# Altium PCB PCB1.PcbDoc
Units mm, origin at the board's own origin, x right, y up, seen from the top; angles counter-clockwise.
Board outline 97.16 x 44.58 mm, 2 copper layers (Top Layer, Bottom Layer); 28 components, 19 nets, 65 pads, 0 vias.
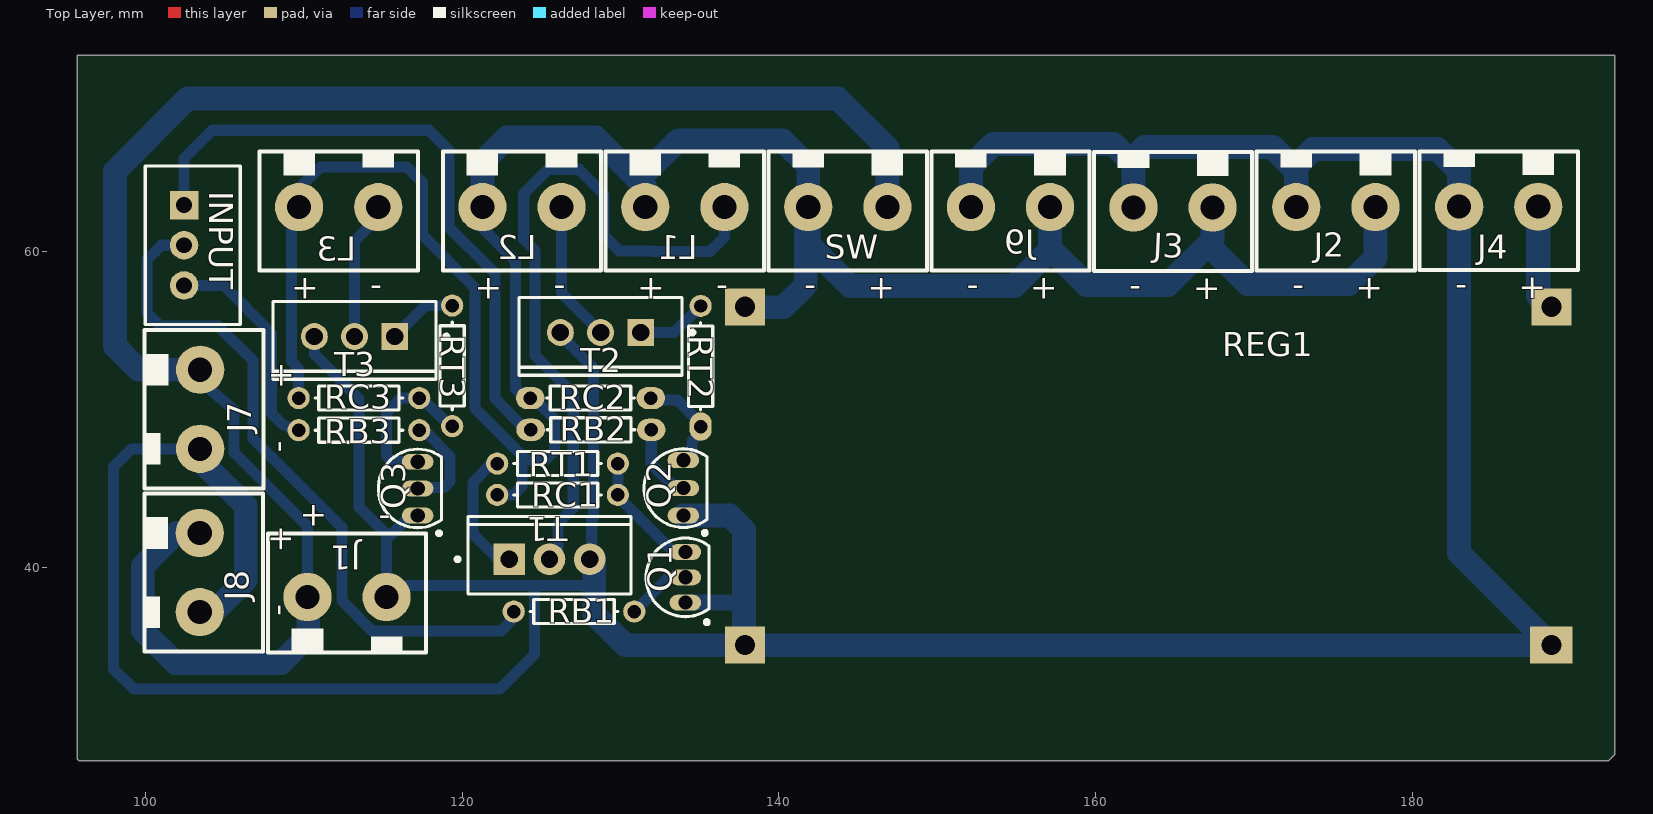
[diagram p0: Top Layer view]
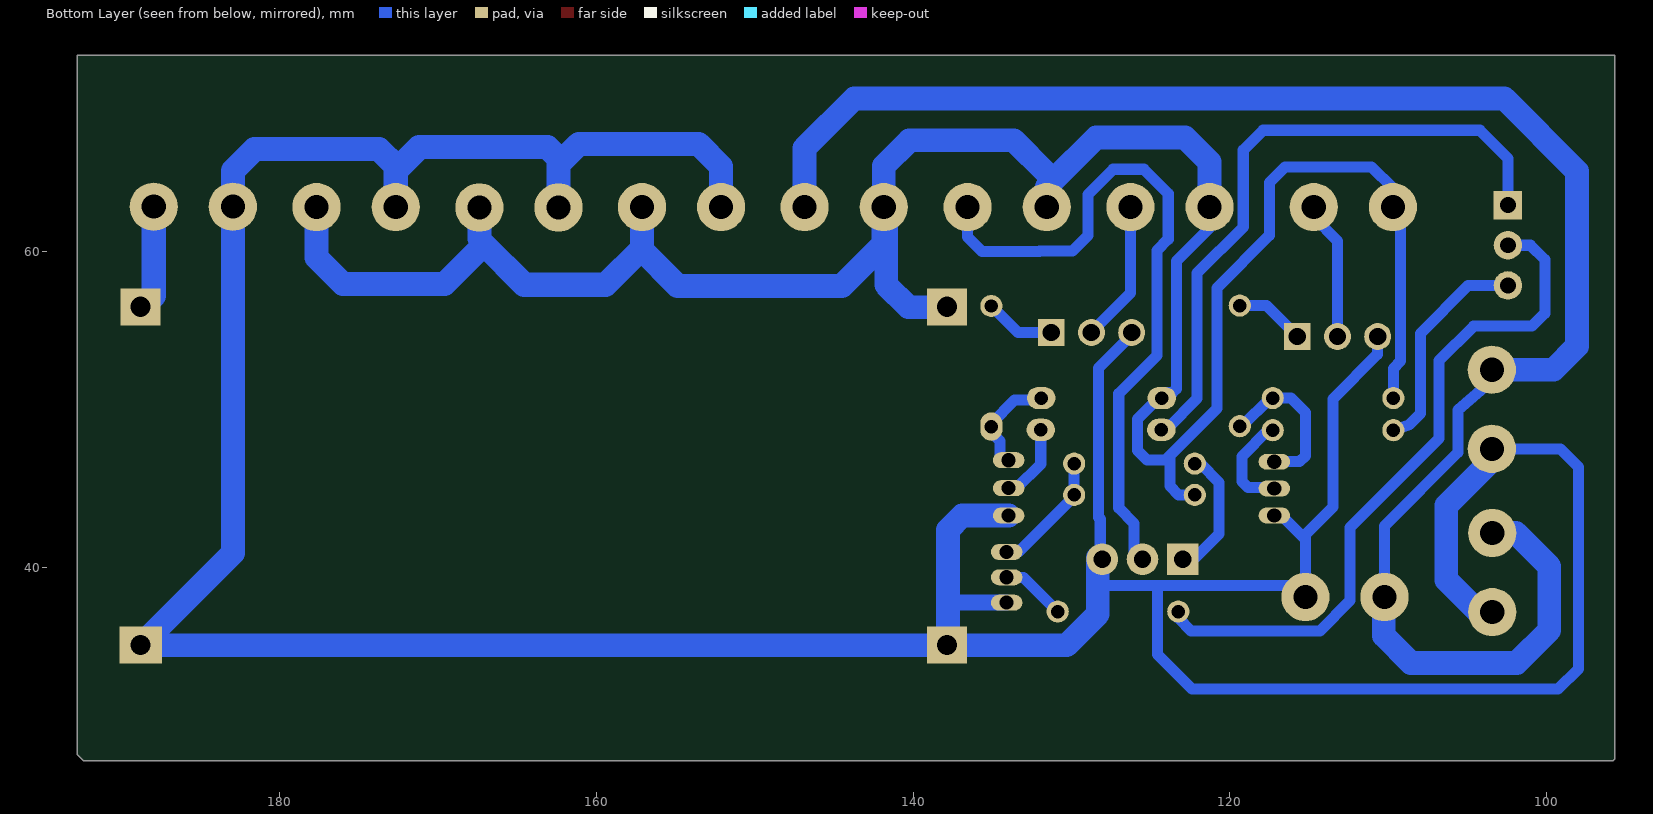
[diagram p1: Bottom Layer view, seen from below]

## Layer stack, top to bottom
Top Solder: solder mask 0.0102, Solder Resist, Dk 3.5
Top Layer: signal copper 0.0356
Dielectric 1: dielectric 0.32, FR-4, Dk 4.8
Bottom Layer: signal copper 0.0356
Bottom Solder: solder mask 0.0102, Solder Resist, Dk 3.5

## Board outline
95.656,27.94 95.783,27.813 192.405,27.813 192.811,28.219 192.811,72.365 192.786,72.39 95.656,72.39

## Design rules (kind name [scope] priority, off if disabled: settings)
Clearance [All] p1: gap=0.254 ignorepadtopadclearanceinfootprint=FALSE except(0: Arc-Hole Track-Hole SMDPad-Hole THPad-Hole Via-Hole Fill-Hole Poly-Hole Region-Hole Text-Hole)
PolygonConnect [All] p1: connectstyle=Relief reliefconductorwidth=0.254 reliefentries=4 polygonreliefangle="90 Angle" airgapwidth=0.254
RoutingVias [All] p1: holewidth=0.711 width=1.27 viastyle="Through Hole" minholewidth=0.711 minwidth=1.27 maxholewidth=0.711 maxwidth=1.27
SolderMaskExpansion [All] p1: expansion=0.102
Width [All] p1: maxlimit=2.3 minlimit=0.7 preferedwidth=0.7 minimp=50.000000 maximp=50.000000 favimp=50.000000
30 further rules are at their usual default settings.

## Components (designator, comment, footprint, x,y, rotation, side; value= is the part's Value field where it differs from the comment)
INPUT "Connector" "1x3x2.54 Pin Header TH V" 102.413,60.376 r270 top
J1 "Bateria" CONN2 112.711,38.151 r0 top
J2 "Driver 2" CONN2 175.184,62.789 r180 top
J3 "Driver 1" CONN2 164.897,62.763 r180 top
J4 "Salida 5V" CONN2 185.471,62.814 r180 top
J7 "Cargador de Bateria" CONN2 103.429,50.013 r270 top
J8 "Pantalla Bateria" CONN2 103.403,39.7 r270 top
J9 "Salida Regulador" CONN2 154.624,62.789 r180 top
L1 "Driver 2" CONN2 134.05,62.789 r0 top
L2 "Driver 2" CONN2 123.763,62.789 r0 top
L3 "Driver 2" CONN2 112.181,62.789 r0 top
Q1 "2N3904" TO-92A#1 134.087,39.395 r0 top
Q2 "2N3904" TO-92A#2 133.96,45.034 r0 top
Q3 "2N3904" TO-92A#3 117.17,45.013 r0 top
RB1 "Res1" AXIAL-0.3#1 127.051,37.236 r0 top value=10K
RB2 "Res1" AXIAL-0.3#2 128.118,48.717 r0 top value=10K
RB3 "Res1" AXIAL-0.3#1 113.462,48.692 r0 top value=10K
RC1 "Res1" AXIAL-0.3#1 126.009,44.602 r180 top value=1K
RC2 "Res1" AXIAL-0.3#2 128.092,50.724 r180 top value=1K
RC3 "Res1" AXIAL-0.3#1 113.462,50.724 r180 top value=1K
REG1 "Voltage regulator IN: 7-35V OUT: ADJ" CP8-ADJ 163.322,46.33 r0 top
RT1 "Res1" AXIAL-0.3#1 126.009,46.584 r180 top value=1K
RT2 "Res1" AXIAL-0.3#3 135.052,52.73 r90 top value=1K
RT3 "Res1" AXIAL-0.3#1 119.355,52.756 r90 top value=1K
SW "SWITCH" CONN2 144.348,62.789 r180 top
T1 "TIP31C" ONSC-TO-220-3-221A-09#1 125.501,40.538 r90 top
T2 "TIP31C" ONSC-TO-220-3-221A-09#2 128.727,54.864 r270 top
T3 "TIP31C" ONSC-TO-220-3-221A-09#2 113.182,54.61 r270 top

## Footprints (in the part's own frame and the unit in brackets; to place one, negate y for a bottom-side part, rotate by r counter-clockwise, add the part's x,y. Pads: shape width x height; smd on the part's side, far side on the other; paste and mask are expansions set on the pad)
"1x3x2.54 Pin Header TH V" [mm] "1x3x2.54 Pin Header TH V"
  rect 1.8x1.8 hole 1: 1(-2.54,0)
  round 1.8 hole 1: 2(0,0) 3(2.54,0)
  silkscreen extent -5,-2.45 5,3.55, body extent -3.81,-1.27 3.81,1.27, height 8.55
AXIAL-0.3#1 [mm] "Axial Device, Thru-Hole; 2 Leads; 0.3 in Pin Spacing"
  round 1.4 hole 0.85: 1(-3.81,0) 2(3.81,0)
  silkscreen extent -2.77,-0.76 2.77,0.76
AXIAL-0.3#2 [mm] "Axial Device, Thru-Hole; 2 Leads; 0.3 in Pin Spacing"
  oval 1.8x1.4 hole 0.85: 1(-3.81,0) 2(3.81,0)
  silkscreen extent -2.77,-0.76 2.77,0.76
AXIAL-0.3#3 [mm] "Axial Device, Thru-Hole; 2 Leads; 0.3 in Pin Spacing"
  oval 1.8x1.4 hole 0.85: 1(-3.81,0)
  round 1.4 hole 0.85: 2(3.81,0)
  silkscreen extent -2.77,-0.76 2.77,0.76
CONN2 [mil]
  round 120 hole 60: 1(-98.43,0) 2(98.42,0)
  silkscreen extent -197,-138 197,157, body extent -197,-138 197,157, height 394
CP8-ADJ [mil]
  rect 100x92 hole 50: IN+(-1003,400) IN-(-1003,-441) OUT+(1003,400)
  rect 106x92 hole 50: OUT-(1003,-441)
  body extent -1058,-497 1068,448, height 573
ONSC-TO-220-3-221A-09#1 [mm] "FM, 3-Leads, Body 10.3x4.85mm, Pitch 2.54mm"
  rect 2x2 hole 1.1: 1(0,2.54)
  round 2 hole 1.1: 2(0,0) 3(0,-2.54)
  silkscreen extent -2.2,-5.15 2.69,5.92, body extent -2.18,-5.15 2.67,5.15, height 19.85
ONSC-TO-220-3-221A-09#2 [mm] "FM, 3-Leads, Body 10.3x4.85mm, Pitch 2.54mm"
  rect 1.7x1.7 hole 1.1: 1(0,2.54)
  round 1.7 hole 1.1: 2(0,0) 3(0,-2.54)
  silkscreen extent -2.21,-5.15 2.69,5.93, body extent -2.18,-5.15 2.67,5.15, height 19.85
TO-92A#1 [mm] "TO, Flat Index; 3 In-Line, Axial Leads; Body Dia. 4.5mm; Leads 0.51 x 0.48 mm (max)"
  oval 2x1 hole 0.9: 1(0,-1.595) 2(0,0) 3(0,1.605)
  silkscreen extent -2.48,-2.95 1.5,2.48, body extent -2.48,-2.5 1.5,2.5, height 6.86
TO-92A#2 [mm] "TO, Flat Index; 3 In-Line, Axial Leads; Body Dia. 4.5mm; Leads 0.51 x 0.48 mm (max)"
  oval 2x1 hole 0.9: 1(0,-1.734) 2(0,0) 3(0,1.766)
  silkscreen extent -2.48,-2.95 1.5,2.48, body extent -2.48,-2.5 1.5,2.5, height 6.86
TO-92A#3 [mm] "TO, Flat Index; 3 In-Line, Axial Leads; Body Dia. 4.5mm; Leads 0.51 x 0.48 mm (max)"
  oval 2x1 hole 0.9: 1(0,-1.713) 2(0,0) 3(0,1.687)
  silkscreen extent -2.48,-2.95 1.5,2.48, body extent -2.48,-2.5 1.5,2.5, height 6.86

## Part data
INPUT: library part "Header 1x3"
J1 J2 J3 J4 J7 J8 J9 L1 L2 L3 SW: library part Bornera
Q1 Q2 Q3: "NPN General Purpose Amplifier", ComponentLink1Description="Manufacturer Link", ComponentLink1URL=http://www.fairchildsemi.com/, ComponentLink2Description=Datasheet, ComponentLink2URL=http://www.fairchildsemi.com/ds/2N%2F2N3904.pdf, DatasheetVersion=1997, LatestRevisionDate=15-Jan-2003, LatestRevisionNote="PCB Footprint 'BCY-W3/D4.7' replaced", PackageDescription="TO, Flat Index; 3 In-Line, Axial Leads; Body Dia. 4.5mm; Leads 0.51 x 0.48 mm (max)", PackageReference=TO-92A, PackageVersion=Sep-1998, Published=8-Jun-2000, Publisher="Altium Limited"
RB1 RB2 RB3 RC1 RC2 RC3 RT1 RT2 RT3: "Resistor", LatestRevisionDate=17-Jul-2002, LatestRevisionNote="Re-released for DXP Platform.", PackageDescription="Axial Device, Thru-Hole; 2 Leads; 0.3 in Pin Spacing", PackageReference=AXIAL-0.3, Published=8-Jun-2000, Publisher="Altium Limited"
REG1: library part CP8-ADJ, DeviceSetName=CP8-ADJ, GateName_1=G$1, LibraryName=userlib, Package=CP8-ADJ, SymbolName_1=VREG-CP8
T1 T2 T3: library part CMP-1048-00031-1, "Complementary Silicon Plastic Power Transistor, 3-Pin TO-220, Tube", Manufacturer="On Semiconductor", ComponentLink1Description="Manufacturer URL", ComponentLink1URL=http://www.onsemi.com/, ComponentLink2Description=Datasheet, ComponentLink2URL=http://www.onsemi.com/pub_link/Collateral/TIP31A-D.PDF, ComponentLink3Description="Package Specification", ComponentLink3URL=http://www.onsemi.com/pub_link/Collateral/221A-09.PDF, DatasheetVersion="Rev. 14", fT Min (MHz)=3, IC Continuous (A)=3, Mounting Technology="Through Hole", PackageDescription="3-Pin Flange Mount, Vertical Straight Lead, Body 9.97 x 4.445 mm, Pitch 2.54 mm", PackageReference=TO-220-3-221A-09, PackageVersion="Rev. AG, 09/2011", Packing=Tube, PartNumber=TIP31C, Polarity=NPN, RoHS=FALSE

## Nets (pads, with @x,y where several pads share a name; then routed paths per layer and width w, separated by ;. In a path a pad name is that pad's centre, name@x,y a point inside that pad or via, vN(x,y) a via of type N, cw(c..) or ccw(c..) an arc to the next point about the centre after c; other vN are vias at no path point)
BATERIA: J2.1 J3.1 J9.1 L1.1 L2.1 L3.1 RC1.2 RC2.2 RC3.2 REG1.IN+ SW.2 | length 157.7
  Bottom Layer w0.7: RC3.2 109.652,52.603 109.188,53.067 109.188,61.661 109.681,62.153 L3.1 109.681,63.986 111.023,65.329 116.484,65.329 117.475,64.338 117.475,61.011 120.802,57.683 120.802,50.063 123.774,47.092 ; L2.1 121.263,61.464 123.342,59.385 123.342,51.313 123.598,51.058 RC2.2@123.948,51.058 ; 122.911,44.602 123.215,44.602 123.774,45.161 123.774,47.092 ; RC2.2 124.482,50.724 125.812,49.394 125.812,47.402 125.222,46.812 124.054,46.812 123.774,47.092 ; L1.1 131.55,64.055 131.55,64.926 ; SW.2@141.698,62.639 SW.2
  Bottom Layer w1.5: L2.1 121.263,65.637 122.809,67.183 128.422,67.183 131.115,64.491 L1.1@131.55,64.055 ; 131.55,64.926 133.629,67.005 140.233,67.005 141.848,65.39 SW.2 ; REG1.IN+@137.846,56.464 140.284,56.464 141.698,57.878 141.698,60.463 SW.2@141.698,62.639
  Bottom Layer w1.524: SW.2 141.848,60.463 144.501,57.81 154.864,57.81 157.124,60.071 157.124,60.173 ; J9.1 157.124,60.173 ; 167.397,60.797 J3.1 ; J2.1 177.684,59.599 176.022,57.937 169.596,57.937 167.107,60.427 164.558,57.878 159.419,57.878 157.124,60.173
GND: J1.2 J2.2 J3.2 J4.2 J7.2 J8.2 J9.2 Q1.1 Q2.1 Q3.1 REG1.IN- REG1.OUT- T1.3 T2.3 T3.3 | length 268
  Bottom Layer w0.7: J7.2 99.1,47.513 97.968,46.38 97.968,33.604 99.238,32.334 122.377,32.334 124.562,34.519 124.562,38.862 124.587,38.887 ; T3.3 110.642,53.492 113.462,50.673 113.462,43.84 115.211,42.092 115.211,41.783 ; J1.2 J1.2@115.211,38.887 ; Q3.1@116.762,43.334 115.211,41.783 ; Q3.1 117.214,43.256 Q3.1@117.221,43.256 ; T2.3@125.781,54.889 126.009,54.889 128.27,52.629 128.27,43.18 128.168,43.078 128.168,40.64 T1.3@128.321,40.64 ; 128.321,38.887 124.587,38.887 ; 137.714,37.8 137.795,37.719 ; REG1.IN-@137.795,35.179 REG1.IN- ; REG1.OUT-@188.62,35.103 REG1.OUT-@188.798,35.103 ; J1.2@115.211,38.887 124.587,38.887 ; J1.2@115.211,38.887 115.211,41.783
  Bottom Layer w1: Q1.1 137.714,37.8
  Bottom Layer w1.5: J8.2 104.276,37.2 106.307,39.231 106.307,43.934 103.429,46.812 J7.2 ; 128.321,38.887 128.321,37.084 130.302,35.103 REG1.OUT-@188.62,35.103 ; 128.321,39.141 T1.3@128.321,40.64 ; Q2.1 136.888,43.3 137.795,42.393 137.795,37.719 REG1.IN-@137.795,35.179
  Bottom Layer w1.524: J9.2 152.124,65.358 153.543,66.777 161.112,66.777 162.397,65.492 ; J3.2 162.397,65.492 ; J2.2 172.684,65.086 ; REG1.OUT-@188.62,35.103 188.214,35.509 188.214,35.687 182.971,40.93 J4.2 182.971,65.086 181.61,66.446 173.736,66.446 172.684,65.394 172.684,65.086 ; 162.397,65.492 162.397,65.877 163.093,66.573 171.196,66.573 172.684,65.086
NetINPUT_1: INPUT.1 RB2.1 | length 41
  Bottom Layer w0.7: INPUT.1 102.413,65.862 104.191,67.64 117.881,67.64 119.135,66.386 119.135,61.535 122.047,58.623 122.047,50.696 123.901,48.842 123.901,48.717 RB2.1
NetINPUT_2: INPUT.2 RB1.1 | length 43.9
  Bottom Layer w0.7: INPUT.2 100.99,60.376 100.076,59.461 100.076,56.083 100.889,55.27 104.572,55.27 106.756,53.086 106.756,48.169 112.395,42.53 112.395,37.922 114.3,36.017 122.428,36.017 123.241,36.83 RB1.1
NetINPUT_3: INPUT.3 RB3.1 | length 13.9
  Bottom Layer w0.7: INPUT.3 104.927,57.836 107.95,54.813 107.95,49.735 108.635,49.05 RB3.1
NetJ1_1: J1.1 J7.1 J8.1 SW.1 | length 113
  Bottom Layer w0.7: J7.1 103.429,51.822 105.557,49.973 105.557,47.299 110.211,42.646 J1.1 J1.1@110.261,38.1
  Bottom Layer w1.5: J8.1 101.916,42.2 99.797,40.081 99.797,36.052 101.863,33.985 108.534,33.985 110.261,35.712 J1.1@110.261,38.1 ; J7.1 99.532,52.513 98.044,54 98.044,65.049 102.641,69.647 143.713,69.647 146.848,66.512 SW.1
NetJ4_1: J4.1 REG1.OUT+ | length 6.8
  Bottom Layer w1.524: J4.1 187.971,57.19 188.697,56.464 REG1.OUT+@188.798,56.464
NetL1_2: L1.2 T1.2 | length 44
  Bottom Layer w0.7: T1.2@126.035,40.64 126.035,42.799 127,43.764 127,51.003 124.587,53.416 124.587,60.047 123.876,60.759 123.876,63.633 125.419,65.176 127.375,65.176 128.956,63.596 128.956,60.985 129.921,60.02 132.012,60.02 132.006,59.995 135.636,59.995 136.55,60.909 L1.2
NetL2_2: L2.2 T2.2 | length 8.6
  Bottom Layer w0.7: L2.2 126.263,57.353 128.448,55.169 T2.2@128.549,55.169
NetL3_2: L3.2 T3.2 | length 8.8
  Bottom Layer w0.7: T3.2 113.182,60.655 114.681,62.153 L3.2
NetQ1_2: Q1.2 RB1.2 | length 4.1
  Bottom Layer w0.7: RB1.2 133.02,39.395 Q1.2
NetQ1_3: Q1.3 RC1.1 RT1.1 | length 7.5
  Bottom Layer w0.7: RT1.1 RC1.1 129.819,44.514 133.338,40.996 Q1.3@133.756,40.996
NetQ2_2: Q2.2 RB2.2 | length 4.8
  Bottom Layer w0.7: RB2.2 131.928,46.566 133.46,45.034 Q2.2
NetQ2_3: Q2.3 RC2.1 RT2.1 | length 7
  Bottom Layer w0.7: RC2.1@132.055,50.724 RC2.1 132.036,50.59 133.582,50.59 135.052,49.12 RT2.1 135.052,48.531 134.517,47.996 134.517,46.939 134.378,46.8 Q2.3
NetQ3_2: Q3.2 RB3.2 | length 6.5
  Bottom Layer w0.7: Q3.2 117.228,45.07 118.832,45.07 119.228,45.466 119.228,47.041 117.577,48.692 RB3.2
NetQ3_3: Q3.3 RC3.1 RT3.1 | length 9.9
  Bottom Layer w0.7: Q3.3@116.742,46.711 115.57,46.711 115.211,47.07 115.211,49.806 116.129,50.724 RC3.1 117.424,50.724 119.202,48.946 RT3.1 RT3.1@119.221,48.812
NetRT1_2: RT1.2 T1.1 | length 8.8
  Bottom Layer w0.7: RT1.2 121.844,46.584 120.659,45.398 120.659,42.13 122.149,40.64 T1.1@123.495,40.64
NetRT2_2: RT2.2 T2.1 | length 4.5
  Bottom Layer w0.7: T2.1 133.375,54.864 RT2.2
NetRT3_2: RT3.2 T3.1 | length 4.4
  Bottom Layer w0.7: T3.1 117.678,56.566 RT3.2

## Silkscreen, mask and mechanical layers (free items; w line width, h text height)
Mechanical 1:
  lines w0.254: 191.541,28.092 191.694,27.94 ; 95.656,27.94 95.783,27.813 192.405,27.813 192.811,28.219 192.811,72.365 192.786,72.39 95.656,72.39 95.656,27.94

## Text inside footprints (layer, text, board x,y; h text height)
J1: Top Overlay "-" at 114.711,42.651 h1.52; Top Overlay "+" at 109.711,42.651 h1.52
J2: Top Overlay "-" at 173.184,58.289 h1.52 r180; Top Overlay "+" at 178.184,58.289 h1.52 r180
J3: Top Overlay "-" at 162.897,58.263 h1.52 r180; Top Overlay "+" at 167.897,58.263 h1.52 r180
J4: Top Overlay "-" at 183.471,58.314 h1.52 r180; Top Overlay "+" at 188.471,58.314 h1.52 r180
J7: Top Overlay "-" at 107.929,48.013 h1.52 r270; Top Overlay "+" at 107.929,53.013 h1.52 r270
J8: Top Overlay "+" at 107.903,42.7 h1.52 r270; Top Overlay "-" at 107.903,37.7 h1.52 r270
J9: Top Overlay "-" at 152.624,58.289 h1.52 r180; Top Overlay "+" at 157.624,58.289 h1.52 r180
L1: Top Overlay "-" at 136.05,58.289 h1.52 r180; Top Overlay "+" at 131.05,58.289 h1.52 r180
L2: Top Overlay "-" at 125.763,58.289 h1.52 r180; Top Overlay "+" at 120.763,58.289 h1.52 r180
L3: Top Overlay "-" at 114.181,58.289 h1.52 r180; Top Overlay "+" at 109.181,58.289 h1.52 r180
REG1: Mechanical 3 "0UT+" at 180.696,55.905 h1.52; Mechanical 3 "OUT-" at 180.696,34.315 h1.52; Mechanical 3 "IN -" at 140.056,34.315 h1.52; Mechanical 3 "IN+" at 140.056,55.905 h1.52; Mechanical 5 "VALUE" at 140.462,32.36 h1.97
SW: Top Overlay "-" at 142.348,58.289 h1.52 r180; Top Overlay "+" at 147.348,58.289 h1.52 r180